# Altium PCB PCB1.PcbDoc
Units mil, origin at the board's own origin, x right, y up, seen from the top; angles counter-clockwise.
Board outline 785.53 x 2368.45 mil, 2 copper layers (Top Layer, Bottom Layer); 7 components, 33 nets, 122 pads, 53 vias.
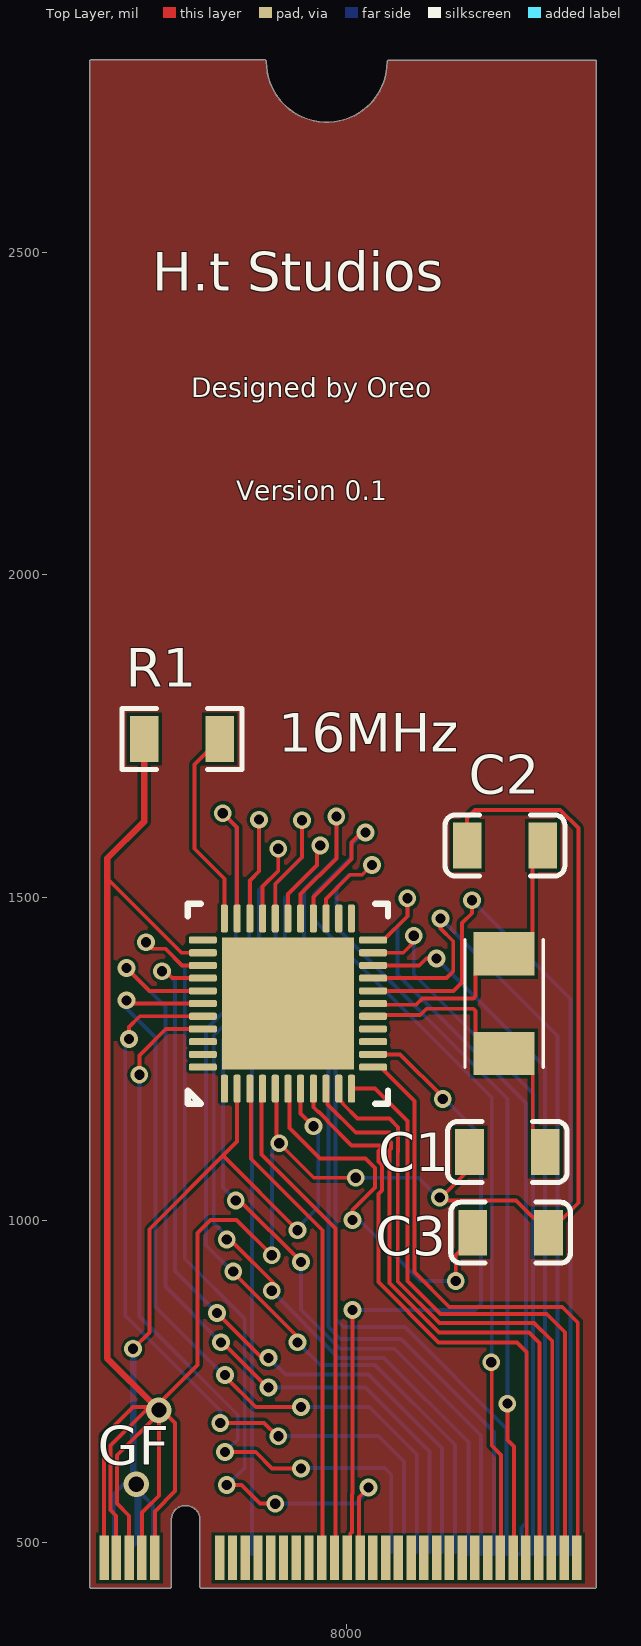
[diagram p0: Top Layer view]
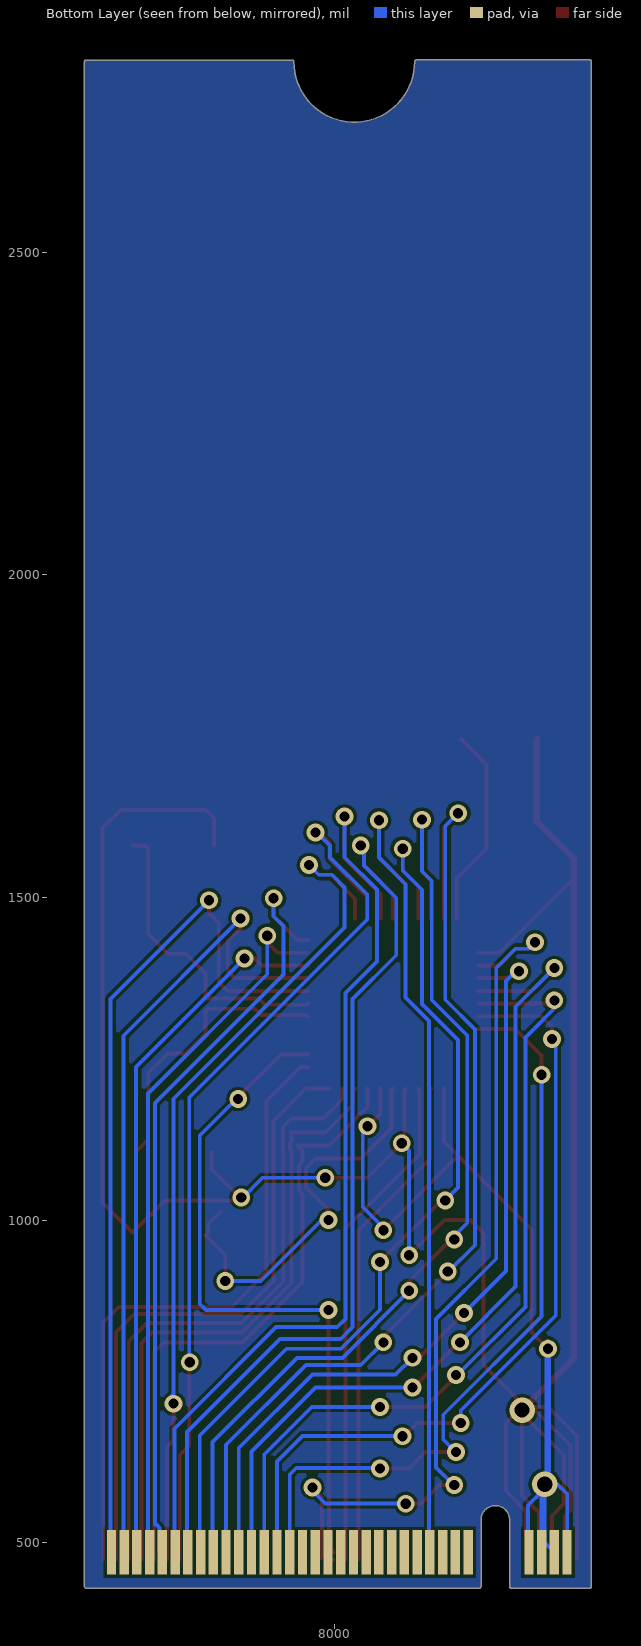
[diagram p1: Bottom Layer view, seen from below]
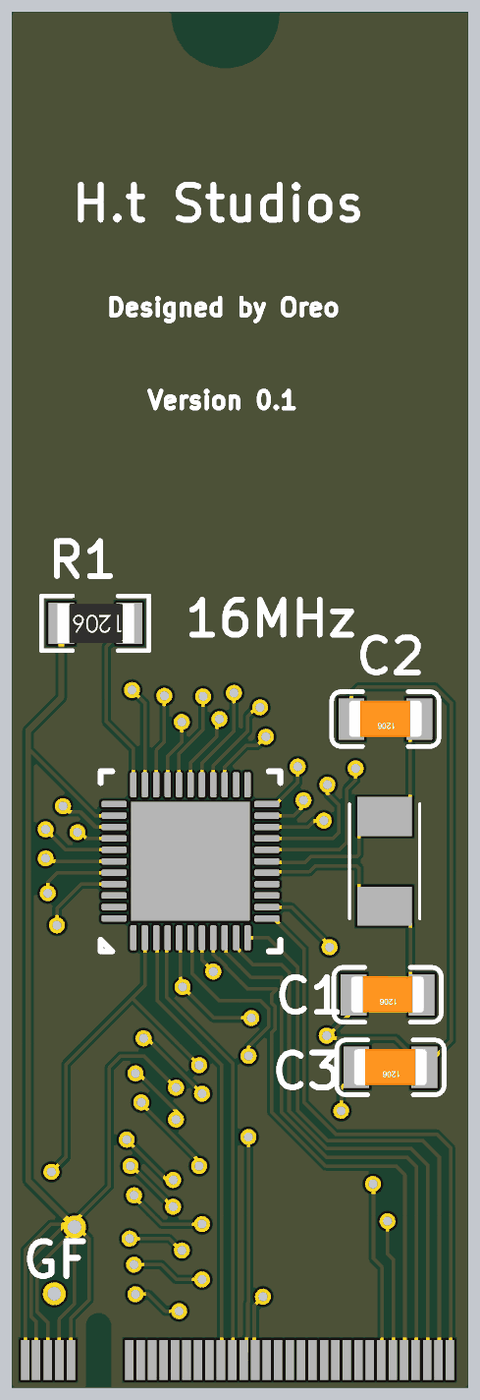
[diagram p2: 3D render of the assembled board from above, using the file's embedded part models]

## Layer stack, top to bottom
Top Solder: solder mask 0.4, Solder Resist, Dk 3.5
Top Layer: signal copper 1.4
Dielectric 1: dielectric 12.6, FR-4, Dk 4.8
Bottom Layer: signal copper 1.4
Bottom Solder: solder mask 0.4, Solder Resist, Dk 3.5

## Board outline
7605.61,429.53 ccw(c7606.22,431.97) 7606.22,429.45 7726.78,429.45 ccw(c7726.78,431.97) 7729.29,431.97 7729.29,535 ccw(c7726.78,535) 7729.18,535.74 ccw(c7726.78,536.47) 7729.29,536.36 cw(c7751.39,535.36) 7773.46,536.89 7773.46,431.97 ccw(c7775.98,431.97) 7775.98,429.45 8384.28,429.45 ccw(c8384.28,431.97) 8384.89,429.53 ccw(c8385.5,431.97) 8388.01,431.97 8388.01,2795 ccw(c8385.5,2795) 8385.5,2797.51 8066.18,2797.51 ccw(c8066.18,2795) 8063.66,2795 cw(c7970,2795) 7876.34,2795 ccw(c7873.82,2795) 7875.39,2796.96 ccw(c7873.43,2795.39) 7873.43,2797.91 7605,2797.91 cw(c7605,2795.39) 7605,2797.91 ccw(c7605,2795.39) 7602.48,2795.39 7602.49,431.97 ccw(c7605,431.97)

## Design rules (kind name [scope] priority, off if disabled: settings)
Clearance [All] p1: gap=5 ignorepadtopadclearanceinfootprint=TRUE
DiffPairsRouting [All] p1: maxlimit=10 minlimit=10 mostfreqgap=10 toplayer_minwidth=6 toplayer_maxwidth=15 toplayer_prefwidth=15 bottomlayer_minwidth=6 bottomlayer_maxwidth=15 bottomlayer_prefwidth=15 maxuncoupledlength=500
PolygonConnect [All] p1: connectstyle=Relief reliefconductorwidth=10 reliefentries=4 polygonreliefangle="90 Angle" airgapwidth=10
RoutingVias [All] p1: holewidth=28 width=50 viastyle="Through Hole" minholewidth=28 minwidth=50 maxholewidth=28 maxwidth=50
SolderMaskExpansion [All] p1: expansion=4
Width [All] p1: maxlimit=10 minlimit=6 preferedwidth=10 minimp=50.000000 maximp=50.000000 favimp=50.000000
29 further rules are at their usual default settings.

## Classes and differential pairs
differential pair X: +X_P -X_N
differential pair D: +D_P -D_N

## Components (designator, comment, footprint, x,y, rotation, side; value= is the part's Value field where it differs from the comment)
16MHz "晶振" OSC-SMD_2P-L5.0-W3.2 8244.88,1335.39 r90 top
C1 "220pF (221) 10% 50V" 1206_C 8249.88,1105.39 r180 top
C2 "220pF (221) 10% 50V" 1206_C 8246.22,1580.4 r180 top
C3 "1uF (105) 10% 50V" 1206_C 8254.88,980.4 r180 top
GF "Core GoldFinger" "Core GoldFinger" 7988.78,466.97 r0 top
R1 "10KΩ (1002) ±1%" 1206_R 7745.66,1745.39 r180 top
? "32U4 MCU" 32U4 7909.88,1335.39 r90 top

## Footprints (in the part's own frame and the unit in brackets; to place one, negate y for a bottom-side part, rotate by r counter-clockwise, add the part's x,y. Pads: shape width x height; smd on the part's side, far side on the other; paste and mask are expansions set on the pad)
32U4 [mm]
  rrect50% 1.1x0.28 smd: 1(-3.35,2.5) 2(-3.35,2) 3(-3.35,1.5) 4(-3.35,1) 5(-3.35,0.5) 6(-3.35,0) 7(-3.35,-0.5) 8(-3.35,-1) 9(-3.35,-1.5) 10(-3.35,-2) 11(-3.35,-2.5) 23(3.35,-2.5) 24(3.35,-2) 25(3.35,-1.5) 26(3.35,-1) 27(3.35,-0.5) 28(3.35,0) 29(3.35,0.5) 30(3.35,1) 31(3.35,1.5) 32(3.35,2) 33(3.35,2.5)
  rrect50% 0.28x1.1 smd: 12(-2.5,-3.35) 13(-2,-3.35) 14(-1.5,-3.35) 15(-1,-3.35) 16(-0.5,-3.35) 17(0,-3.35) 18(0.5,-3.35) 19(1,-3.35) 20(1.5,-3.35) 21(2,-3.35) 22(2.5,-3.35) 34(2.5,3.35) 35(2,3.35) 36(1.5,3.35) 37(1,3.35) 38(0.5,3.35) 39(0,3.35) 40(-0.5,3.35) 41(-1,3.35) 42(-1.5,3.35) 43(-2,3.35) 44(-2.5,3.35)
  rect 5.2x5.2 smd: 45(0,0)
  silkscreen extent -3.94,-3.94 3.94,3.94
1206_C [mm]
  rect 1.13x1.8 smd: 1(-1.49,0) 2(1.49,0)
  silkscreen extent -2.36,-1.2 2.35,1.2, body extent -1.6,-0.81 1.6,0.79, height 1
1206_R [mm]
  rect 1.13x1.8 smd: 1(-1.49,0) 2(1.49,0)
  silkscreen extent -2.36,-1.2 2.35,1.2, body extent -1.7,-0.86 1.65,0.87, height 0.85
"Core GoldFinger" [mm]
  rect 0.368x1.75 smd: 1(9.371,0.236) 3(8.868,0.236) 5(8.366,0.236) 7(7.864,0.236) 9(7.362,0.236) 11(6.86,0.236) 13(6.358,0.236) 15(5.856,0.236) 17(5.354,0.236) 19(4.852,0.236) 21(4.349,0.236) 23(3.847,0.236) 25(3.345,0.236) 27(2.843,0.236) 29(2.341,0.236) 31(1.839,0.236) 33(1.337,0.236) 35(0.835,0.236) 37(0.333,0.236) 39(-0.169,0.236) 41(-0.672,0.236) 43(-1.174,0.236) 45(-1.676,0.236) 47(-2.178,0.236) 49(-2.68,0.236) 51(-3.182,0.236) 53(-3.684,0.236) 55(-4.186,0.236)
  rect 0.368x1.75 smd far side: 2(9.08,0.468) 4(8.579,0.468) 6(8.078,0.468) 8(7.576,0.468) 10(7.075,0.468) 12(6.574,0.468) 14(6.072,0.468) 16(5.571,0.468) 18(5.069,0.468) 20(4.568,0.468) 22(4.067,0.468) 24(3.565,0.468) 26(3.064,0.468) 28(2.563,0.468) 30(2.061,0.468) 32(1.56,0.468) 34(1.058,0.468) 36(0.557,0.468) 38(0.056,0.468) 40(-0.446,0.468) 42(-0.947,0.468) 44(-1.448,0.468) 46(-1.95,0.468) 48(-2.451,0.468) 50(-2.953,0.468) 52(-3.454,0.468) 54(-3.955,0.468) 56(-4.457,0.468) 58(-4.958,0.468) 68(-7.354,0.468) 70(-7.854,0.468) 72(-8.354,0.468) 74(-8.854,0.468)
  rect 0.375x1.75 smd: 57(-4.685,0.236) 67(-7.243,0.236) 69(-7.751,0.236) 71(-8.259,0.236) 73(-8.767,0.236) 75(-9.243,0.236)
OSC-SMD_2P-L5.0-W3.2 [mm]
  rect 1.7x2.4 smd: 1(-1.96,0) 2(1.96,0)
  silkscreen extent -2.51,-1.54 2.51,1.54

## Part data
C1 C2: library part "1206 220pF (221) 10% 50V", "贴片电容", Package=1206, SuppliersPartNumber=C1854, ComponentLink1Description=供应商链接, ComponentLink1URL=http://www.szlcsc.com/product/details_2206.html, Supplier=LC
C3: library part "1206 1uF (105) 10% 50V", "贴片电容", Package=1206, SuppliersPartNumber=C1848, ComponentLink1Description=供应商链接, ComponentLink1URL=http://www.szlcsc.com/product/details_2200.html, Supplier=LC
R1: library part "1206 10KΩ (1002) 1%", "贴片电阻", Package=1206, SuppliersPartNumber=C17902, ComponentLink1Description=供应商链接, ComponentLink1URL=http://www.szlcsc.com/product/details_18590.html, Supplier=LC

## Via types
v1: diameter 27.56, hole 15.75, Top Layer to Bottom Layer, 51 vias
v2: diameter 39.37, hole 23.62, Top Layer to Bottom Layer, 2 vias

## Nets (pads, with @x,y where several pads share a name; then routed paths per layer and width w, separated by ;. In a path a pad name is that pad's centre, name@x,y a point inside that pad or via, vN(x,y) a via of type N, cw(c..) or ccw(c..) an arc to the next point about the centre after c; other vN are vias at no path point)
+5: ?.2 ?.7 GF.68 GF.70 GF.72 GF.74 | length 1593.3
  Top Layer w6: v1(7669.88,800.39) 7695.2,825.71 7695.2,985.71 7809.23,1099.74 ; ?.2 7831.14,1121.66 7809.23,1099.74 ; v1(7924.88,984.09) 7809.23,1099.74 ; ?.7 7929.57,1165.08 v1(7949.25,1145.39) v1@7949.25,1137.99
  Bottom Layer w6: GF.74 7639.88,485.71 7639.88,575.39 7654.88,590.39 7664.88,590.39 v2@7667.95,590.39 ; GF.72 7674.88,500.39 v2@7674.88,583.46 ; v2@7662.95,595.39 7664.88,593.46 v2@7667.95,590.39 ; GF.70 v2@7679.57,578.78 ; GF.68@7700.47,482.56 7700.47,557.87 v2@7679.57,578.78 ; v1(7924.88,984.09) 7920.97,984.09 7956.87,1019.99 7956.87,1137.78 v1(7949.25,1145.39) ; v2@7667.95,590.39 7669.88,590.39 v2(7674.88,590.39) ; v2@7667.95,590.39 7669.88,588.46 v2@7674.88,583.46 ; v2@7674.88,583.46 v2(7674.88,590.39) ; v2@7674.88,583.46 v2@7679.57,578.78 ; v2(7674.88,590.39) 7679.57,585.71 v2@7679.57,578.78
  Bottom Layer w10: v2@7664.88,590.39 v2@7664.88,593.46 ; v2@7669.88,588.46 7669.88,590.39 v1(7669.88,800.39) v1@7669.88,810.39
CLED: ?.36 GF.35 | length 1392.4
  Top Layer w6: v1(7689.88,1430.39) 7699.88,1420.39 7719.88,1420.39 7745.83,1394.45 ?.36 ; v1(7815,589.47) 7837.68,589.47 7866.76,560.39 v1(7890.2,560.39) ; GF.35 8019.88,478.02 8019.88,570.39 v1(8034.88,585.39)
  Bottom Layer w6: v1(7689.88,1430.39) 7699.88,1420.39 7719.88,1420.39 7749.88,1390.39 7749.88,940 7843.02,846.86 7843.02,616.67 7815.82,589.47 v1(7815,589.47) ; v1(7890.2,560.39) 8014.88,560.39 8034.88,580.39 v1(8034.88,585.39)
COL1: ?.18 GF.2 | length 1352.9
  Top Layer w6: ?.18 8166.66,1355.08 8179.88,1368.3 8179.88,1460.39 8194.88,1475.39 v1(8194.88,1495.39)
  Bottom Layer w6: v1(8194.88,1495.39) 8347.5,1342.78 GF.2@8347.5,482.56
COL2: ?.19 GF.4 | length 1279.3
  Top Layer w6: ?.19 8042.4,1375.39 8043.03,1374.76 8155.35,1374.76 8165.98,1385.39 8165.98,1431.93 8146.07,1451.84 v1(8146.07,1467.28)
  Bottom Layer w6: v1(8146.07,1467.28) 8327.76,1285.59 GF.4@8327.76,482.56
COL3: ?.20 GF.6 | length 1095.1
  Top Layer w6: ?.20 8113.3,1394.45 8124.24,1405.39 v1(8139.88,1405.39)
  Bottom Layer w6: v1(8139.88,1405.39) 8308.02,1237.26 GF.6@8308.02,482.56
COL4: ?.21 GF.8 | length 1117.8
  Top Layer w6: ?.21 8088.62,1414.13 8108.28,1433.8 8104.88,1437.2 v1(8104.88,1440.39)
  Bottom Layer w6: v1(8104.88,1440.39) 8104.88,1380.88 8289.88,1195.88 8289.88,484.16 GF.8@8288.28,482.56
COL5: ?.22 GF.10 | length 1207.9
  Top Layer w6: ?.22 8057.91,1433.82 8094.88,1470.79 v1(8094.88,1498.51) v1@8093.39,1498.51
  Bottom Layer w6: v1(8094.88,1498.51) 8094.88,1470.79 8079.88,1455.79 8079.88,1380.39 8278.88,1181.39 8278.88,527.84 8276.49,527.84 8271.81,523.16 8271.81,485.83 GF.10@8268.54,482.56
COL6: ?.27 GF.12 | length 1530.2
  Top Layer w6: ?.27 7929.57,1505.08 7984.88,1560.39 v1(7984.88,1625.39)
  Bottom Layer w6: v1(7984.88,1625.39) 7984.88,1562.17 7934.88,1512.17 7934.88,1400.39 7983.45,1351.82 7983.45,846.82 7996.36,833.91 8091.36,833.91 8248.8,676.48 GF.12@8248.8,482.56
COL7: ?.28 GF.14 | length 1431.7
  Top Layer w6: ?.28 7909.88,1505.4 7954.88,1550.39 v1@7954.88,1570.39
  Bottom Layer w6: v1(7959.88,1580.39) 7954.88,1575.39 7954.88,1549.21 7904.88,1499.21 7904.88,1410.35 7972.45,1342.78 7972.45,833.91 7990.97,815.39 8084.88,815.39 8229.06,671.21 GF.14@8229.06,482.56
COL8: ?.30 GF.16 | length 1465.4
  Top Layer w6: v1(7828.95,1030.39) 7834.88,1030.39 7929.88,935.39 v1(7929.88,935) ; ?.30 7870.51,1516.58 7894.88,1540.95 v1(7894.88,1575.39)
  Bottom Layer w6: v1(7828.95,1030.39) 7808.95,1050.39 7808.95,1278.9 7864.88,1334.84 7864.88,1511.78 7894.88,1541.78 v1(7894.88,1575.39) ; v1(7929.88,935) 7929.88,860.93 7990.41,800.39 8074.88,800.39 8209.32,665.95 GF.16@8209.32,482.56
COL9: ?.31 GF.18 | length 1552.4
  Top Layer w6: v1(7815,970) 7820.28,970 7894.88,895.39 7889.88,890.39 v1(7884.88,890.39) ; ?.31 7850.83,1526.34 7864.88,1540.39 v1(7864.88,1620.39)
  Bottom Layer w6: v1(7815,970) 7820.28,970 7794.88,995.39 7794.88,1286 7849.88,1341 7849.88,1525.39 7864.88,1540.39 v1(7864.88,1620.39) ; v1(7884.88,890.39) 7884.88,889.84 7988.33,786.39 8058.88,786.39 8189.58,655.69 GF.18@8189.58,482.56
COL10: ?.32 GF.20 | length 1554.8
  Top Layer w6: v1(7808.95,1630.39) 7831.14,1608.2 ?.32 ; v1(7825,920) 7825,918.95 7924.88,819.06 v1(7924.88,810.39)
  Bottom Layer w6: v1(7808.95,1630.39) 7828.95,1610.39 7828.95,1341.33 7783.01,1295.39 7783.01,960.94 7823.95,920 v1(7825,920) ; v1(7924.88,810.39) 7959.88,775.39 8044.88,775.39 8168.62,651.65 GF.20
COL11: ?.37 GF.22 | length 1246.7
  Top Layer w6: v1(7714.88,1385.39) 7719.88,1385.39 7730.51,1374.76 ?.37 ; v1(7799.88,855.93) 7879.88,775.93 v1(7879.88,786.39)
  Bottom Layer w6: v1(7714.88,1385.39) 7719.88,1385.39 7734.88,1370.39 7734.88,920.93 v1(7799.88,855.93) ; v1(7879.88,786.39) 7905.88,760.39 8034.88,760.39 8148.88,646.39 GF.22
COL12: ?.38 GF.24 | length 1324.3
  Top Layer w6: v1(7659.88,1390.39) 7695.2,1355.08 ?.38 ; v1(7806.31,810.39) 7808.32,810.39 7879.88,738.83 v1(7879.88,740.39)
  Bottom Layer w6: v1(7659.88,1390.39) 7719.88,1330.39 7719.88,896.82 v1(7806.31,810.39) ; v1(7879.88,740.39) 8029.88,740.39 8129.14,641.13 GF.24
COL13: ?.39 GF.26 | length 1278.6
  Top Layer w6: v1(7659.88,1340.39) 7664.88,1335.39 ?.39 ; v1(7812.52,760) 7812.52,757.76 7859.88,710.39 v1(7929.88,710.39)
  Bottom Layer w6: v1(7659.88,1340.39) 7652.17,1340.39 7649.88,1338.1 7704.88,1283.1 7704.88,865.39 7810.28,760 v1(7812.52,760) ; v1(7929.88,710.39) 8035.88,710.39 8109.4,636.87 GF.26
COL14: ?.40 GF.28 | length 1227.2
  Top Layer w6: v1(7663.61,1280.39) 7663.61,1299.13 7680.2,1315.71 ?.40 ; v1(7804.88,685.39) 7873.03,685.39 7893.43,665 v1(7895,665)
  Bottom Layer w6: v1(7663.61,1280.39) 7661.96,1280.39 7657.79,1284.57 7657.79,851.74 7804.88,704.64 v1(7804.88,685.39) ; v1(7895,665) 8050.28,665 8089.67,625.61 GF.28@8089.67,515.61
COL15: ?.41 GF.30 | length 1204.1
  Top Layer w6: v1(7679.57,1225.08) 7679.57,1255.08 7720.51,1296.02 ?.41 ; v1(7812.52,640.39) 7859.88,640.39 7885.24,615.04 7885.2,615 v1(7929.88,615)
  Bottom Layer w6: v1(7679.57,1225.08) 7679.57,850.71 7832.02,698.26 7832.02,659.9 v1(7812.52,640.39) ; v1(7929.88,615) 7925,615 7924.6,615.39 8059.88,615.39 8069.93,605.35 GF.30
D_N: ?.3 GF.41 | length 776.8
  Top Layer w6: ?.3 7852.67,1201.66 7852.67,1094.98 7963.56,984.09 GF.41@7963.56,473.42
D_P: ?.4 GF.39 | length 778.3
  Top Layer w6: ?.4 7868.67,1201.66 7868.67,1101.61 7983.33,986.95 GF.39@7983.33,473.42
GND: ?.5 ?.35 C1.2 C2.2 C3.1 GF.67 GF.69 GF.71 GF.73 GF.75 R1.2 | length 4784.3
  Top Layer w6: GF.75 7624.9,665.41 7669.88,710.39 v2@7694.88,710.39 ; 7629.88,1529.13 7744.87,1414.13 ?.35 ; GF.73 7643.61,541.66 7634.88,550.39 7634.88,650.39 v2@7694.88,710.39 ; GF.71 7663.61,541.66 7644.88,560.39 7644.88,635.39 v2@7709.88,700.39 ; GF.69 7683.61,546.44 7709.88,572.71 v2@7709.88,700.39 ; GF.67 7703.61,548.5 7734.88,579.77 7734.88,685.39 7709.88,710.39 v2(7709.88,705.39) ; v2@7704.88,710.39 7769.88,775.39 7769.88,979.88 7790,1000 7830.28,1000 v1(7884.88,945.39) ; ?.5 7892.27,1201.43 7892.27,1123 v1(7896.37,1118.91) 7949.88,1065.39 v1(8014.88,1065.39) ; v1(8145,1035) v1@8145,1032.48 ; C2.2 8187.56,1623.07 8199.88,1635.39 8331.72,1635.39 8359.88,1607.24 8359.88,1026.73 C3.1 8263.54,1030.39 8147.09,1030.39 v1@8145,1032.48 ; C1.2 8191.22,1078.7 8152.91,1040.39 8137.09,1040.39 v1@8145,1032.48 ; v2@7694.88,710.39 7699.88,705.39 v2(7709.88,705.39) ; v2@7709.88,700.39 v2(7709.88,705.39)
  Top Layer w10: R1.2 7686.99,1617.51 7629.88,1560.39 7629.88,1529.13 7629.88,785.39 7704.88,710.39 v2(7709.88,705.39)
  Bottom Layer w6: v1(7884.88,945.39) 7884.88,1107.42 v1(7896.37,1118.91) ; v1(8014.88,1065.39) 8112.09,1065.39 8145,1032.48 v1(8145,1035)
KLED: ?.29 GF.52 | length 1338.3
  Top Layer w6: ?.29 7890.2,1520.71 7931.66,1562.17 v1(7931.66,1619.42)
  Bottom Layer w6: GF.52@7854.02,482.56 7854.02,1308.42 7890.44,1344.84 7890.44,1520.39 7931.66,1561.62 v1(7931.66,1619.42)
Net_6: ?.6 C3.2 | length 643.8
  Top Layer w6: ?.6 7912.39,1200.99 7912.39,1142.57 7959.57,1095.39 8029.88,1095.39 8044.88,1080.39 8044.88,1050.57 8010,1015.69 v1(8010,1000) ; v1(8169.88,905.39) 8169.88,946.01 8200.24,976.37 C3.2 8196.22,993.58 C3.2@8176.98,1012.83
  Bottom Layer w6: v1(8010,1000) 8020.28,1000 8114.88,905.39 v1(8169.88,905.39)
Net_33: ?.33 R1.1 | length 313.7
  Top Layer w6: R1.1 7764.88,1705.96 7764.88,1575.39 7811.46,1528.82 ?.33
RESET: ?.13 GF.37 | length 1068.8
  Top Layer w6: GF.37@8001.87,485.39 8006.39,489.91 8006.39,514.02 8008.88,516.51 8008.88,574.95 8009.88,575.95 v1(8009.88,860.39) ; GF.37@8003.1,473.42 GF.37@8006.39,476.72 ; ?.13 8083.62,1256.65 8149.88,1190.39 v1(8149.88,1187.36)
  Bottom Layer w6: v1(8009.88,860.39) 8199.88,860.39 8209.32,869.84 8209.32,1130.95 8152.91,1187.36 v1(8149.88,1187.36)
ROW1: ?.12 GF.1 | length 1004.2
  Top Layer w6: ?.12 8053.31,1236.97 8106,1184.28 8106,919.28 8159.88,865.39 8334.88,865.39 8358.92,841.36 GF.1@8358.92,473.42
ROW2: ?.11 GF.3 | length 985.2
  Top Layer w6: ?.11 8045.06,1203.51 8095,1153.56 8095,905.46 8146.07,854.39 8310.88,854.39 8339.15,826.13 GF.3@8339.15,473.42
ROW3: ?.10 GF.5 | length 982.1
  Top Layer w6: ?.10 7988.62,1187.36 7994.8,1181.19 7994.8,1180.15 8017.89,1157.06 8066.96,1157.06 8080.31,1143.71 8080.31,1106.28 8080,1105.98 8080,904.9 8144.51,840.39 8291.37,840.39 8319.38,812.38 GF.5@8319.38,473.42
ROW4: ?.9 GF.7 | length 981.1
  Top Layer w6: ?.9 7971.45,1200.99 7971.45,1178.83 8014.88,1135.39 8067.17,1135.39 8067.17,1122.09 8069.31,1119.95 8069.31,1110.84 8067.17,1108.7 8067.17,902.18 8143.95,825.39 8283.38,825.39 8299.61,809.16 GF.7@8299.61,473.42
ROW5: ?.8 GF.9 | length 979.9
  Top Layer w6: ?.8 7949.25,1174.79 7956.87,1167.17 7958.27,1167.17 7971.03,1154.42 7971.03,1153.01 8008.65,1115.39 8058.31,1115.39 8050,1107.09 8050,1090.83 8055.88,1084.95 8055.88,1046.02 8050,1040.13 8050,903.79 8143.4,810.39 8264.88,810.39 8279.85,795.43 GF.9@8279.85,473.42
ROW6: ?.25 GF.11 | length 1344.2
  Top Layer w6: ?.25 7968.94,1497.72 8006.22,1535 8025,1535 v1(8040,1550) ; v1(8249.88,715.39) 8249.88,659.17 8260.08,648.98 GF.11@8260.08,473.42
  Bottom Layer w6: v1(8040,1550) 8025,1535 8004.49,1535 7984.88,1515.39 7984.88,1453.1 8250,1187.98 8250,730.28 v1@8257.38,722.89
ROW7: ?.26 GF.13 | length 1467.1
  Top Layer w6: ?.26 7949.25,1500.39 8008.31,1559.45 8008.31,1585.09 8023.61,1600.39 v1(8029.88,1600.39) ; GF.13@8240.31,473.42 8240.31,635.78 8225.7,650.39 8225.7,778.76 v1(8224.88,779.58) v1@8231.92,779.58 ; v1@8231.92,779.58 8234.06,779.58 8234.88,780.39 8233.81,781.46 v1@8231.92,779.58
  Bottom Layer w6: v1(8029.88,1600.39) 8027.67,1600.39 8007.67,1580.39 8007.67,1562 7949.88,1504.21 7949.88,1465.39 8225.7,1189.58 8225.7,780.39 v1(8224.88,779.58)
X_N: 16MHz.2 ?.17 C2.1 | length 472.9
  Top Layer w6: ?.17 8043.61,1333.55 8108.28,1333.55 8118.13,1343.39 8197.12,1343.39 8200.64,1346.91 8200.64,1382.1 8231.1,1412.56 16MHz.2 8258.66,1412.56 8289.13,1443.02 8289.13,1575.39 8294.13,1580.39 C2.1@8313.54,1580.39
X_P: 16MHz.1 ?.16 C1.1 | length 444.5
  Top Layer w6: ?.16 8043.61,1317.55 8114.91,1317.55 8124.75,1327.39 8197.12,1327.39 8200.64,1323.88 8200.64,1288.69 8231.1,1258.23 16MHz.1 8258.66,1258.23 8289.3,1227.59 8289.3,1124.64 C1.1
pads on no net: ?.1 ?.14 ?.15 ?.23 ?.24 ?.34 ?.42 ?.43 ?.44 ?.45 GF.15 GF.17 GF.19 GF.21 GF.23 GF.25 GF.27 GF.29 GF.31 GF.32 GF.33 GF.34 GF.36 GF.38 GF.40 GF.42 GF.43 GF.44 GF.45 GF.46 GF.47 GF.48 GF.49 GF.50 GF.51 GF.53 GF.54 GF.55 GF.56 GF.57 GF.58

## Polygon pours and split planes (outlines as drawn)
no net on Top Layer "Top Layer-No Net" (solid, pour order 1): 7605.61,429.53 ccw(c7606.22,431.97) 7606.22,429.45 7726.78,429.45 ccw(c7726.78,431.97) 7729.29,431.97 7729.29,535 ccw(c7726.78,535) 7729.18,535.74 ccw(c7726.78,536.47) 7729.29,536.36 cw(c7751.39,535.36) 7773.46,536.89 7773.46,431.97 ccw(c7775.98,431.97) 7775.98,429.45 8384.28,429.45 ccw(c8384.28,431.97) 8384.89,429.53 ccw(c8385.5,431.97) 8388.01,431.97 8388.01,2795 ccw(c8385.5,2795) 8385.5,2797.51 8066.18,2797.51 ccw(c8066.18,2795) 8063.66,2795 cw(c7970,2795) 7876.34,2795 ccw(c7873.82,2795) 7875.39,2796.96 ccw(c7873.43,2795.39) 7873.43,2797.91 7605,2797.91 cw(c7605,2792.88) 7605,2797.91 ccw(c7605,2795.39) 7602.48,2795.39 7602.49,431.97 ccw(c7605,431.97)
no net on Bottom Layer "Top Layer-No Net1" (solid, pour order 2): 7605.61,429.53 ccw(c7606.22,431.97) 7606.22,429.45 7726.78,429.45 ccw(c7726.78,431.97) 7729.29,431.97 7729.29,535 ccw(c7726.78,535) 7729.18,535.74 ccw(c7726.78,536.47) 7729.29,536.36 cw(c7751.39,535.36) 7773.46,536.89 7773.46,431.97 ccw(c7775.98,431.97) 7775.98,429.45 8384.28,429.45 ccw(c8384.28,431.97) 8384.89,429.53 ccw(c8385.5,431.97) 8388.01,431.97 8388.01,2795 ccw(c8385.5,2795) 8385.5,2797.51 8066.18,2797.51 ccw(c8066.18,2795) 8063.66,2795 cw(c7970,2795) 7876.34,2795 ccw(c7873.82,2795) 7875.39,2796.96 ccw(c7873.43,2795.39) 7873.43,2797.91 7605,2797.91 cw(c7605,2792.88) 7605,2797.91 ccw(c7605,2795.39) 7602.48,2795.39 7602.49,431.97 ccw(c7605,431.97)

## Silkscreen, mask and mechanical layers (free items; w line width, h text height)
Top Overlay:
  text "H.t Studios" at 7699.88,2440.39 h60
  text "Designed by Oreo" at 7759.88,2275.39 h30
  text "Version 0.1" at 7829.88,2115.39 h30
Mechanical 1:
  lines w5: 7605,431.97 7605,2795.39 7873.43,2795.39 ; 7606.22,431.97 7726.78,431.97 7726.78,535 ; 7726.78,536.47 cw(c7751.39,535.36) 7775.98,536.97 7775.98,431.97 8384.28,431.97 ; 7873.82,2795 ccw(c7970,2795) 8066.18,2795 8385.5,2795 8385.5,431.97